# Altium PCB Lampda_PCB_V1_1.pcbdoc (part 2 of 2)
Units mm, origin at the board's own origin, x right, y up, seen from the top; angles counter-clockwise.
Board outline 70.99 x 71.73 mm, 2 copper layers (Top Layer, Bottom Layer); 134 components, 139 nets, 552 pads, 286 vias.
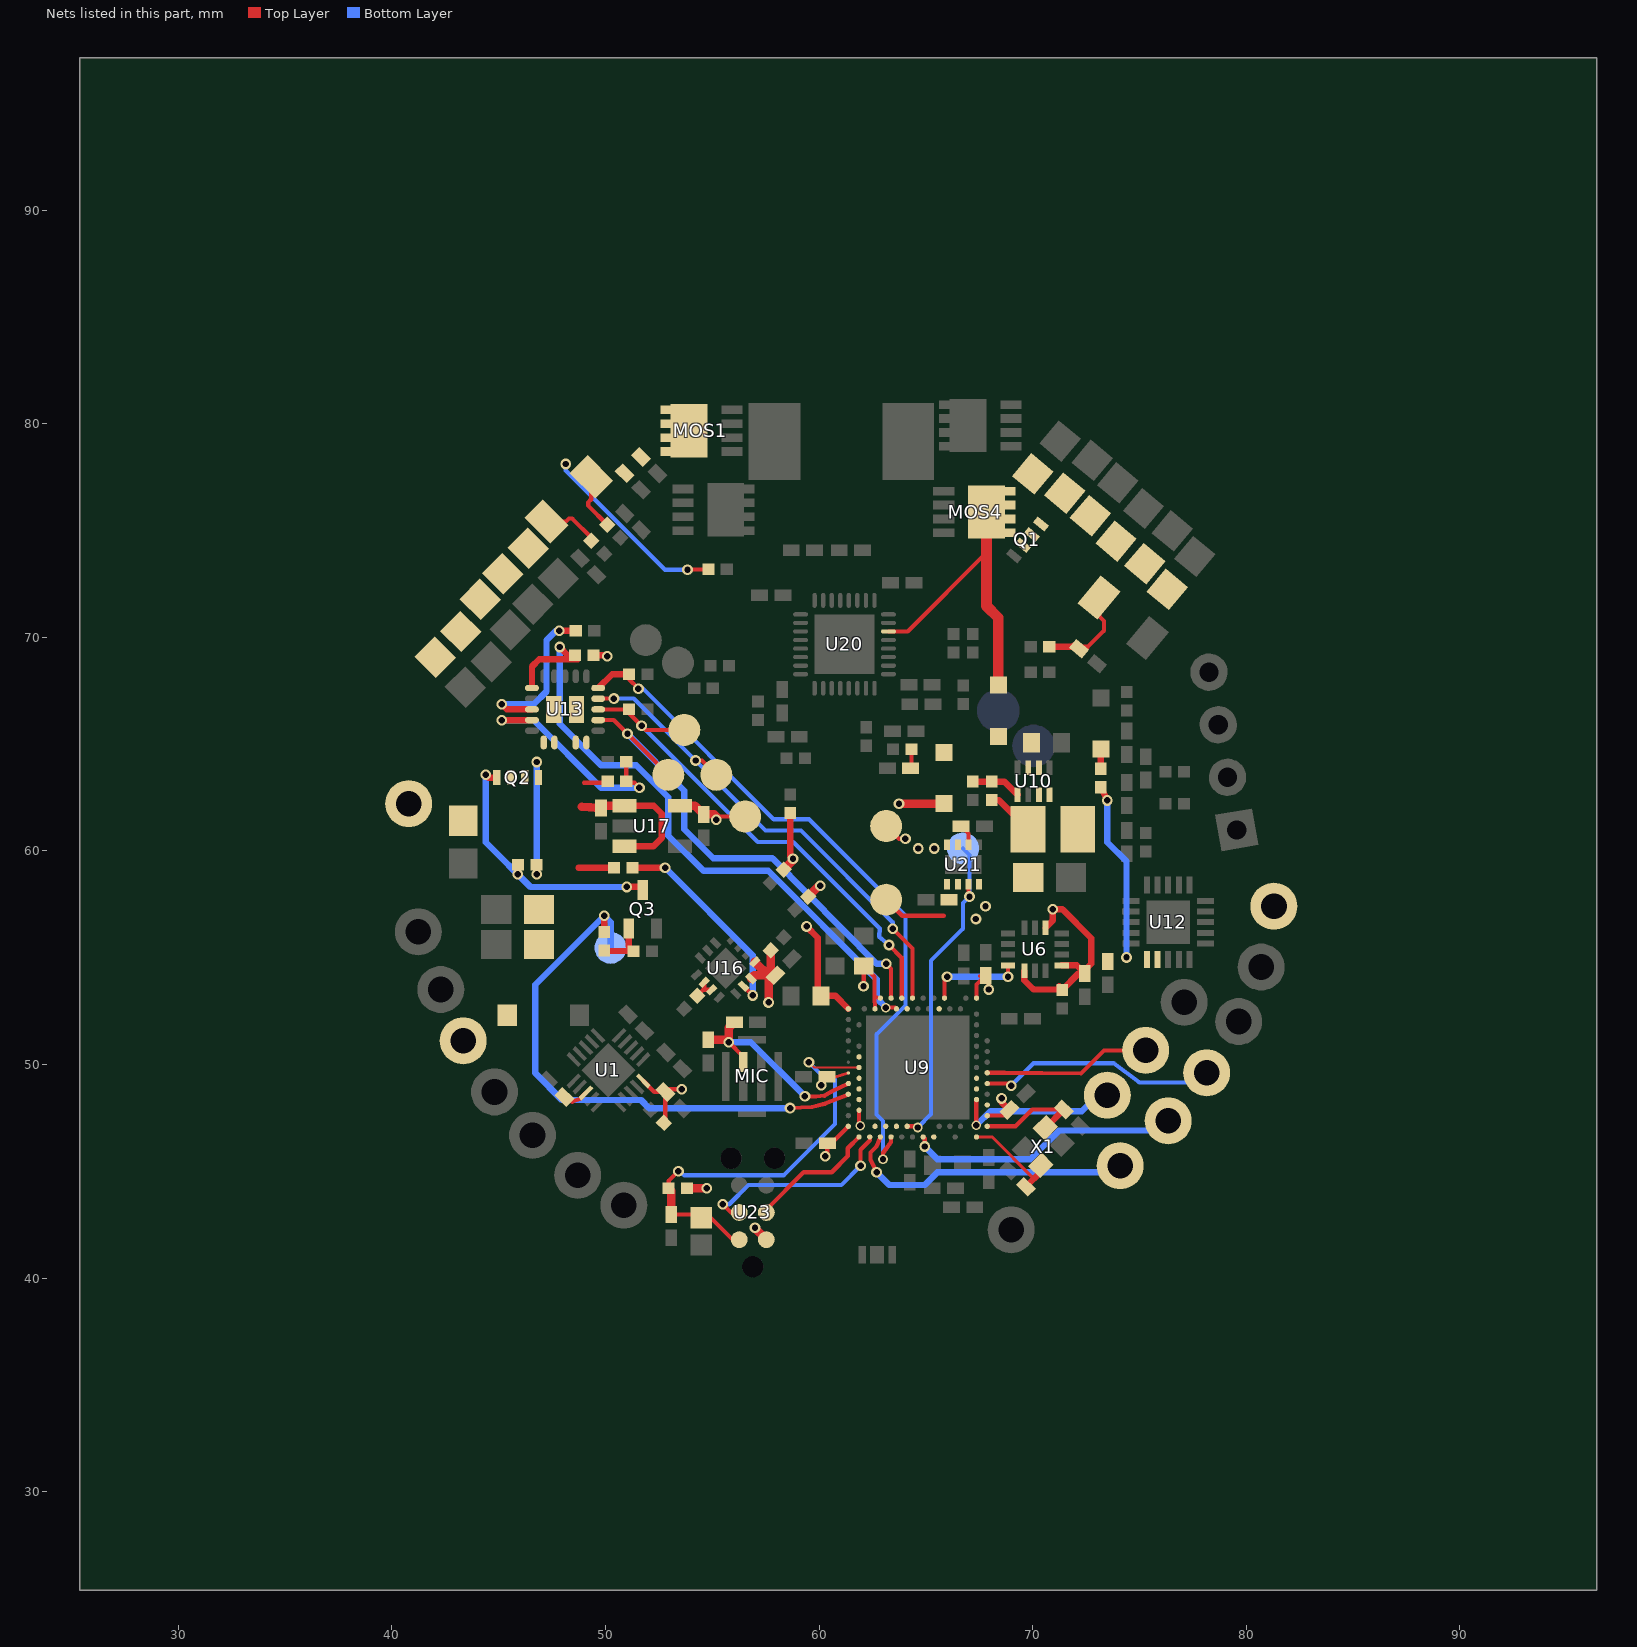
[diagram p2: the nets of this part, all layers, seen from the top]

## Via types
v1: diameter 0.5, hole 0.3, Top Layer to Bottom Layer, tented both sides, 276 vias
v2: diameter 0.45, hole 0.3, Top Layer to Bottom Layer, tented both sides, 10 vias

## Nets (pads, with @x,y where several pads share a name; then routed paths per layer and width w, separated by ;. In a path a pad name is that pad's centre, name@x,y a point inside that pad or via, vN(x,y) a via of type N, cw(c..) or ccw(c..) an arc to the next point about the centre after c; other vN are vias at no path point) (continued)
P0.08: pad.11 U9.N1 U13.4 | length 23.3
  Top Layer w0.2: U13.4@49.664,67.128 v1@50.4,67.135 ; v1(54.222,64.237) 54.524,64.237 pad.11@55.194,63.567 ; v1@63.445,56.368 64.373,55.438 U9.N1@64.374,53.113
  Bottom Layer w0.2: v1@50.4,67.135 51.327,67.135 54.223,64.237 56.265,62.193 57.499,60.957 59.153,60.957 63.445,56.665 v1@63.445,56.368
  other v1: 63.444,56.366 50.4,67.136
P0.09: pad.@76.343,47.367 U9.L24 | length 13.1
  Top Layer w0.2: U9.L24@64.874,46.613 64.945,46.542 v1(64.945,46.167)
  Bottom Layer w0.3: v1(64.945,46.167) 65.544,45.568 69.895,45.568 71.246,46.916 76.344,46.916 pad.@76.344,47.366
P0.10: U9.J24
P0.11: U9.T2 U13.11 U15.1 | length 30.6
  Top Layer w0.2: v2(63.128,52.67) 63.567,52.67 U9.T2@63.624,52.613
  Top Layer w0.3: U13.11@46.565,67.627 46.565,68.633 46.9,68.971 U15.1@48.703,68.969 ; v1@47.86,69.548 48.241,69.167 U15.1@48.57,69.168
  Bottom Layer w0.3: v1@47.86,69.548 47.86,65.951 49.796,64.016 51.444,64.016 52.945,62.517 52.945,60.716 54.594,59.068 57.619,59.068 62.694,53.993 62.694,53.119 v2@63.143,52.667
  other v1: 47.86,69.549
P0.16: U9.AC11
P0.19: U9.AC15
P0.20: C46.1 C58.2 MIC.1 U9.AD16 | length 10
  Top Layer w0.2: v1(55.777,51.051) 56.443,50.385 MIC.1@56.443,50.125 ; v1@59.341,48.514 59.874,48.509 60.255,48.549 60.591,48.74 U9.AD16@61.374,49.113
  Top Layer w0.4: C46.1@54.824,51.167 55.662,51.167 v1(55.777,51.051) 55.777,51.724 C58.2@56.038,51.985
  Bottom Layer w0.3: v1(55.777,51.051) 56.803,51.051 v1@59.341,48.514
  other v1: 59.34,48.514
P0.21: U9.AC17
P0.23: U9.AC19
P0.25: U9.AC21 | length 0.8
  Top Layer w0.2: U9.AC21@61.873,47.863 61.873,47.197 v2(61.937,47.132)
P0.26: U6.4 U9.G1 | length 4.5
  Top Layer w0.2: U9.G1@65.874,53.114 65.874,54.116 v1(65.995,54.116) ; v1(68.844,54.116) 68.844,54.645 U6.4@68.847,54.647
  Bottom Layer w0.3: v1(65.995,54.116) v1(68.844,54.116)
P0.27: U9.H2
P1.01: U9.Y23
P1.02: pad.@74.093,45.267 U9.W24 | length 14.1
  Top Layer w0.2: v1(62.695,44.967) v1(62.695,44.967) 62.414,45.547 62.414,45.885 62.694,46.167 ; 62.695,46.167 U9.W24@62.874,46.613
  Bottom Layer w0.3: v1(62.695,44.967) 63.295,44.366 64.944,44.366 65.544,44.966 74.094,44.966 pad.@74.094,45.267
P1.03: U9.V23
P1.05: U9.T23
P1.07: pad.10@66.744,60.117 U9.P23 U21.3 | length 15.3
  Top Layer w0.2: U9.P23@64.124,47.113 64.563,47.113 v2(64.619,47.057) ; U21.3@66.995,58.439 66.994,57.916 v1(67.044,57.867)
  Bottom Layer w0.2: v2@64.619,47.056 65.244,47.681 65.244,54.867 66.745,56.365 66.745,57.567 67.045,57.866 67.044,59.817 pad.10@66.744,60.117
P1.08: U9.P2
P1.09: pad.3 U8.2 U9.R1 U13.3 | length 23.3
  Top Layer w0.2: U13.3@49.664,66.628 U8.2@51.11,66.628 51.11,66.444 v1(51.693,65.861) 51.887,65.666 pad.3@53.694,65.667 ; v1@63.275,55.601 63.875,54.999 U9.R1@63.875,53.114
  Bottom Layer w0.2: v1(51.693,65.861) 57.136,60.416 58.795,60.416 62.843,56.368 62.816,55.987 v1@63.275,55.601
  other v1: 63.275,55.599
P1.10: U9.A20
P1.11: pad.@73.493,48.568 U9.B19 | length 7.9
  Top Layer w0.2: v2(67.365,47.155) 67.365,48.355 U9.B19@67.374,48.363
  Bottom Layer w0.3: v2(67.365,47.155) 68.025,47.816 72.292,47.816 73.044,48.567 pad.@73.494,48.567
P1.12: U9.B17
P1.13: pad.@78.144,49.617 U9.A16 | length 11.2
  Top Layer w0.2: U9.A16@67.873,49.113 68.898,49.113 v1(68.995,49.016)
  Bottom Layer w0.2: v1(68.995,49.016) 70.045,50.067 73.794,50.067 74.995,49.167 77.694,49.167 pad.@78.144,49.617
P1.14: U9.B15
P1.15: pad.@75.293,50.668 U9.A14 | length 7.9
  Top Layer w0.2: U9.A14@67.873,49.613 68.695,49.617 ; 68.696,49.616 72.264,49.588 73.344,50.665 pad.@75.295,50.665
POWER_RAIL: C5.2 C18.2 C19.2 C32.2 C34.2 Q2.1 Q2.2 Q2.3 R11.2 RAC1.1 U7.1 U13.16 U13.17 U13.22 | length 7.8
  Top Layer w0.2: RAC1.1@47.249,75.421 48.15,75.42 48.294,75.568 48.444,75.568 R11.2@49.338,74.673
  Bottom Layer w0.3: v1(46.791,64.166) 46.794,64.164 v1@46.794,58.916
  other v1: 46.794,58.917
Q2_4: Q2.4 Q3.3 U7.2 | length 12
  Top Layer w0.3: v1(44.394,63.567) 44.53,63.431 Q2.4@44.92,63.431 ; v1(50.995,58.317) 51.592,58.317 Q3.3@51.745,58.165
  Bottom Layer w0.3: v1@44.395,63.566 44.395,60.416 46.496,58.316 v1(50.995,58.317)
  other v1: 45.894,58.917
R1_1: Q3.1 R1.1 R19.2 | length 2.5
  Top Layer w0.3: R19.2@49.945,55.334 51.312,55.316 51.095,55.534 Q3.1@51.095,56.369
R9_2: C7.2 R9.2 RSR1.1 | length 4.9
  Top Layer w0.2: C7.2@72.178,69.466 72.277,69.566 72.595,69.566 73.344,70.315 73.344,70.767 73.113,70.998 RSR1.1@73.113,71.867
  Top Layer w0.3: R9.2@70.777,69.567 72.077,69.567 C7.2@72.177,69.467 72.033,69.61 C7.2@71.914,69.61
R10_1: C23.1 C44.1 MOS1.5 MOS1.6 MOS1.7 MOS1.8 R10.1 R12.1 RAC1.2 | length 11.6
  Top Layer w0.2: RAC1.2@49.341,77.513 49.341,76.462 49.194,76.317 49.194,76.167 R12.1@50.088,75.273 ; v1@53.844,73.167 R10.1@54.818,73.177
  Bottom Layer w0.2: v1@48.145,78.118 48.145,77.815 52.795,73.167 v1@53.844,73.167
  other v1: 53.844,73.167 48.144,78.116
R15_2: R15.2 U16.2 | length 9.8
  Top Layer w0.2: U16.2@56.464,53.676 v1(56.901,53.238)
  Top Layer w0.3: R15.2@51.277,59.217 v1(52.794,59.217)
  Bottom Layer w0.3: v1(52.794,59.217) 52.796,59.217 56.902,55.11 v1@56.902,53.238
R20_2: C20.1 R20.2 | length 0.9
  Top Layer w0.2: C20.1@64.29,63.866 64.327,63.904 R20.2@64.327,64.767
R31_2: R31.2 U28.1 | length 0.9
  Top Layer w0.3: R31.2@73.194,63.849 U28.1@73.194,64.767
RESET: C28.2 pad.1@54.488,42.824 U4.1 U9.AC13 U23.2 | length 20.4
  Top Layer w0.102: v1@59.529,50.107 59.773,49.863 U9.AC13@61.873,49.863
  Top Layer w0.2: U4.1@52.962,44.217 52.962,44.558 v1(53.42,45.016) ; C28.2@53.091,42.988 54.324,42.989 pad.1@54.488,42.824 ; pad.1@54.489,42.824 54.936,42.824 55.952,41.808 U23.2@56.267,41.808
  Top Layer w0.4: U4.1@52.962,44.217 53.091,44.087 C28.2@53.091,42.988
  Bottom Layer w0.2: v1@53.41,45.016 53.694,44.816 58.345,44.816 60.745,47.216 60.745,49.317 60.453,49.609 60.027,49.609 v1@59.529,50.107
  other v1: 59.529,50.107
S$72260: 
S$72264: 
S$72268: 
S$72290: 
S$72297: 
S$72301: 
S$72368: 
S$72378: 
S$72382: 
S$72386: 
S$334299: 
S$334303: 
S$488258: 
S$488268: 
S$488287: 
S$488291: 
S$573256: 
S$573287: 
STRIP+: C30.2 pad.@40.794,62.217
STRIP_OUT_DRV: pad.12 R19.1 U9.AD18 | length 26.5
  Top Layer w0.2: v1@58.645,47.965 59.671,48.014 60.276,48.171 U9.AD18@61.374,48.613
  Top Layer w0.3: R19.1@49.945,56.2 v1@49.945,56.967
  Bottom Layer w0.3: pad.12@50.244,55.467 50.245,56.667 v1(49.945,56.967) 46.717,53.739 46.717,52.382 46.717,49.609 47.972,48.344 51.67,48.344 52.046,47.963 v1@58.645,47.963
  other v1: 58.645,47.967
SWDCLK: U9.AA24 U23.4 | length 9.6
  Top Layer w0.2: v1(55.495,43.467) 55.883,43.078 U23.4@56.266,43.078 ; v1(61.945,45.267) 61.945,46.017 62.39,46.462 U9.AA24@62.39,46.6
  Bottom Layer w0.2: v1@55.495,43.467 55.795,43.467 56.694,44.366 61.045,44.366 v1(61.945,45.267)
SWDIO: U9.AC24 U23.3 | length 6.1
  Top Layer w0.2: U23.3@57.537,43.078 57.537,43.223 59.28,44.966 60.596,44.966 61.345,45.717 61.345,46.086 U9.AC24@61.873,46.613
U1_3: C11.1 U1.3 | length 1.2
  Top Layer w0.2: C11.1@48.081,48.481 48.444,48.268 48.802,48.395 U1.3@49.085,48.676
U10_1: R8.1 R13.2 U10.1 | length 2.4
  Top Layer w0.3: R8.1@67.195,63.249 R13.2@68.095,63.249 68.672,63.249 U10.1@69.295,62.627
U10_4: L3.1 U10.4
U10_6: C60.2 U10.6 U10.7 U26.1 U27.1
U12_16: C22.2 R31.1 U12.16 U12.17 | length 8.4
  Top Layer w0.3: R31.1@73.194,62.984 v1(73.494,62.366)
  Bottom Layer w0.3: v1(73.494,62.366) 73.494,60.416 74.394,59.517 v1(74.394,55.016)
U13_13: R5.2 U13.13 | length 7.8
  Top Layer w0.3: v1(45.145,66.867) 45.384,66.628 U13.13@46.564,66.628 ; v1(47.845,70.316) R5.2@48.612,70.316
  Bottom Layer w0.3: v1@45.145,66.865 46.643,66.865 47.245,67.467 47.245,69.868 47.695,70.317 v1@47.845,70.317
U13_14: R6.1 R7.1 U13.14 | length 10.8
  Top Layer w0.2: R6.1@50.977,64.166 50.977,63.307 51.086,63.199 51.363,63.199 v1(51.595,62.967)
  Top Layer w0.3: v1(45.145,66.116) 45.154,66.126 U13.14@46.565,66.126
  Bottom Layer w0.3: v1@45.145,66.116 46.643,66.116 49.796,62.967 v1(51.595,62.967)
U16_12: U16.12 U16.13 U25.1 | length 1.7
  Top Layer w0.2: U16.12@54.622,53.853 54.622,53.544 U25.1@54.301,53.223 ; U16.13@54.976,53.499 54.577,53.499 U25.1@54.301,53.223 ; U25.1@54.286,53.208 54.286,53.163 U25.1@54.286,53.208 ; U25.1@54.286,53.208 U25.1@54.301,53.223 ; U25.1@54.286,53.208 U25.1@54.301,53.223
U21_6: C29.1 U21.6 | length 1
  Top Layer w0.2: C29.1@66.649,61.167 66.994,60.822 U21.6@66.995,60.294
V33: C37.1 C40.1 C41.1 C48.2 C51.1 C55.1 C57.2 L3.2 pad.9@63.144,57.717 R13.1 U4.2 U9.A22 U9.AD14 U9.AD23 U9.B1 U9.W1 U9.Y2 U10.3 U21.1 U21.2 U21.4 U23.1 | length 63.3
  Top Layer w0.152: C41.1@60.367,49.428 60.766,49.421 U9.AD14@61.374,49.613
  Top Layer w0.2: v1(60.295,45.716) 60.39,45.812 C40.1@60.39,46.317 60.577,46.316 U9.AD23@61.374,47.113 ; v1(62.084,53.674) 62.094,53.684 C37.1@62.095,54.617 62.595,54.116 62.595,53.167 U9.W1@62.874,53.114 ; 62.595,53.167 U9.Y2@62.624,52.613 ; pad.9@63.144,57.717 63.894,56.967 65.844,56.967 ; U9.B1@67.374,53.113 67.374,53.75 C55.1@67.795,54.171 ; C55.1@67.544,54.144 67.768,54.144 C55.1@67.795,54.171 ; U9.A22@67.873,47.613 68.641,47.613 C51.1@68.909,47.881 ; v1(67.945,53.517) 67.945,54.021 C55.1@67.795,54.171
  Top Layer w0.3: R13.1@68.095,62.384 68.409,62.385 L3.2@69.778,61.016 ; v1(68.545,48.416) 68.545,48.246 C51.1@68.909,47.881
  Top Layer w0.4: U4.2@53.827,44.217 v1(54.744,44.217) ; v1(57.004,42.371) 57.004,42.341 U23.1@57.536,41.808
  Mid-Layer 2 w0.4: v1(54.744,44.217) 54.744,46.917 57.144,49.317 59.694,49.316 v1(60.103,49.04) ; v1@57.004,42.37 57.004,43.175 59.094,45.265 59.843,45.265 v1(60.295,45.716) ; 59.729,49.456 60.103,49.081 v1(60.103,49.04) ; v1(60.295,45.716) 60.293,47.366 62.544,49.616 62.544,52.466 ; v1@62.084,53.673 63.451,53.673 65.498,55.72 66.247,55.72 v1(67.344,56.816) ; 62.545,53.666 62.544,51.265 60.596,49.317 v1(60.103,49.04) ; 67.342,54.414 67.342,54.864 68.094,55.616 68.094,57.117 v1(67.794,57.416) ; v1(67.945,53.517) 67.945,53.816 67.344,54.417 67.344,53.157 67.494,52.738 67.494,49.466 v1(68.545,48.416)
V33_EXT: C2.2 C3.2 C47.2 pad.9@63.144,61.167 pad.@81.295,57.417 R17.2 R32.2 R33.2 U1.10 U3.1 U5.2 U6.5 U6.8 U6.12 U15.2 U16.3 U16.4 U21.7 U21.8 U24.2 | length 89.1
  Top Layer w0.2: U1.10@51.772,49.241 52.288,48.725 C2.2@52.808,48.725 52.931,48.848 v1(53.575,48.848) ; R17.2@52.739,47.27 52.807,47.27 C2.2@52.807,48.726 ; pad.9@63.144,61.167 63.744,60.567 v1(64.045,60.567)
  Top Layer w0.3: U15.2@49.435,69.168 50.043,69.168 v1(50.094,69.116) ; U5.2@58.645,61.784 58.645,59.779 v1(58.782,59.643) ; U6.5@69.61,54.384 69.61,53.952 69.895,53.668 70.045,53.517 71.396,53.5 72.145,54.267 72.447,54.267 72.447,54.419 72.744,54.716 72.744,55.917 71.394,57.267 v1(70.945,57.267) 70.945,56.745 U6.12@70.609,56.41 ; U24.2@71.246,53.668 71.394,53.519 U24.2@71.394,53.499 ; U6.8@71.371,54.647 72.067,54.647 C47.2@72.446,54.268
  Top Layer w0.4: U16.3@56.818,54.029 56.97,54.181 C3.2@57.959,54.181 ; U16.4@56.994,54.811 57.624,54.181 C3.2@57.959,54.181 ; v1@57.639,52.911 C3.2@57.639,54.181 ; U3.1@57.738,55.345 57.738,54.181 C3.2@57.959,54.181 ; R33.2@58.35,59.132 58.782,59.564 v1(58.782,59.643) ; R32.2@59.493,57.862 60.004,58.373 v1(60.052,58.373)
  Mid-Layer 2 w0.3: v1(70.945,57.267) 70.944,58.316 72.445,59.817 74.096,59.817 76.344,57.567 81.294,57.567 pad.@81.295,57.417
  Mid-Layer 2 w0.4: v1(50.094,69.116) 53.844,69.116 55.493,67.467 60.593,67.467 64.644,63.116 64.645,61.767 65.394,61.167 65.394,60.117 66.753,58.758 69.717,58.758 70.945,57.53 v1(70.945,57.267) ; v1@53.575,48.847 54.462,48.847 57.639,52.022 57.639,52.949 58.957,54.267 60.146,54.267 64.645,58.766 v1(64.645,60.116) ; v1(58.782,59.643) v1(60.052,58.373) ; 59.481,58.936 60.062,59.517 62.995,59.517 v1(64.045,60.567)
  other v1: 57.639,52.912 65.393,60.116
VBUS: C24.1 C27.1 C39.2 pad.@43.345,51.117 R7.2 R15.1 U11.1 U13.19 U13.20 U13.21 U17.1 U17.3 | length 9.9
  Top Layer w0.2: 49.003,63.198 R7.2@50.22,63.198
  Top Layer w0.3: 48.744,59.218 R15.1@50.413,59.218 ; U17.3@50.895,60.217 52.254,60.217 52.645,60.609 52.645,61.736 52.267,62.117 U17.1@50.895,62.117
  Top Layer w0.4: 48.895,62.067 C39.2@49.796,62.012 ; C39.2@49.795,62.012 49.899,62.116 U17.1@50.895,62.116
VBUS5: C21.2 C45.1 pad.4 U9.AD2 U17.5 U26.2 | length 26.4
  Top Layer w0.2: v1(55.195,61.466) 55.345,61.617 pad.4@56.545,61.617
  Top Layer w0.3: v1@59.417,56.467 59.938,55.946 59.938,53.216 C45.1@60.095,53.216 ; C45.1@60.094,53.217 60.77,53.217 U9.AD2@61.374,52.613
  Top Layer w0.4: U17.5@53.495,62.116 54.19,62.116 C21.2@54.595,61.712 55.099,61.712 55.195,61.617 v1(55.195,61.466) ; v1(63.744,62.217) U26.2@65.845,62.216
  Mid-Layer 2 w0.3: v1(55.195,61.466) 55.344,61.466 59.417,57.394 v1@59.417,56.467
  Mid-Layer 2 w0.4: v1(55.195,61.466) 62.994,61.466 63.12,61.592 v1(63.744,62.217)
  other v1: 59.417,56.468
VBUS_GATE_DRV: pad.2 U9.U1 U13.2 | length 23.7
  Top Layer w0.2: U13.2@49.664,66.128 50.391,66.128 v1(51.035,65.485) 52.945,63.574 pad.2@52.944,63.567 ; v1(63.144,54.716) 63.374,54.487 U9.U1@63.374,53.114
  Bottom Layer w0.3: v1@51.035,65.484 53.694,62.824 53.694,61.016 55.043,59.667 57.819,59.667 62.695,54.717 v1(63.144,54.716)
VSBUS_DSCH: U2.2 U9.U24 U13.5 | length 32.7
  Top Layer w0.2: U2.2@51.11,68.279 51.11,68.039 v1(51.547,67.601) ; v2@62.996,45.568 62.995,45.867 63.374,46.396 U9.U24@63.374,46.614
  Top Layer w0.3: U13.5@49.664,67.627 50.314,68.279 U2.2@51.11,68.279
  Bottom Layer w0.2: v1@51.548,67.602 51.759,67.602 57.875,61.486 59.526,61.486 64.045,56.967 64.045,52.766 62.694,51.417 62.694,47.666 62.996,47.366 v2@62.996,45.568
  other v2: 62.995,45.567
VSYS: C35.1 C36.1 C43.1 C52.1 C56.1 C59.1 MOS4.5 MOS4.6 MOS4.7 MOS4.8 Q1.1 Q1.2 Q1.3 U20.22 U27.2 | length 16.3
  Top Layer w0.2: U20.22@63.252,70.277 64.154,70.277 67.842,73.965 MOS4.8@67.842,75.866
  Top Layer w0.5: MOS4.8@67.842,75.866 67.842,71.468 68.393,70.917 U27.2@68.395,67.767
XC1: C31.2 U9.B24 X1.1 | length 4.8
  Top Layer w0.152: U9.B24@67.374,46.613 68.096,46.614 70.044,44.666
  Top Layer w0.3: C31.2@69.68,44.281 70.388,44.989 X1.1@70.389,45.283
XC2: C16.2 U9.A23 X1.3 | length 5.1
  Top Layer w0.2: U9.A23@67.873,47.114 69.193,47.114 69.983,47.904 C16.2@71.459,47.902
  Top Layer w0.3: X1.3@70.601,47.05 70.608,47.05 C16.2@71.459,47.902
pads on no net: F1.2 U1.1 U1.2 U1.14 U1.15 U6.10 U6.11 U9.A18 U9.AB2 U9.B3 U10.2 U12.9 U12.10 U12.15 U13.6 U13.7 U13.8 U13.9 U13.10 U17.4 U23. U23.5

## Polygon pours and split planes (outlines as drawn)
GND on Mid-Layer 1 (solid): 45.289,78.062 52.339,82.412 60.071,84.426 67.789,83.162 75.311,80.616 80.694,73.766 83.694,66.266 83.694,59.816 83.394,57.867 80.094,57.567 65.095,57.567 63.895,58.467 63.295,58.317 63.445,57.717 64.795,56.667 71.845,56.667 76.045,52.617 72.894,48.417 73.945,45.267 71.545,43.467 72.445,41.517 67.639,39.513 67.639,44.463 57.76,44.476 57.76,38.507 50.839,40.713 45.139,44.163 40.339,50.313 38.1,56.994 38.735,65.503 40.789,72.213
VBUS on Top Layer (solid): 46.795,51.267 42.595,48.867 41.245,51.417 46.045,54.117 46.045,58.016 47.395,58.616 47.395,63.566 48.295,64.616 48.295,67.317 49.105,67.317 49.13,65.866 49.495,65.366 49.495,62.817 49.045,62.217 49.045,54.417
POWER_RAIL on Top Layer (solid): 41.845,73.016 45.295,77.966 48.295,75.266 47.545,74.216 45.295,71.966 45.145,71.516 44.245,70.616 44.245,70.166 43.045,68.966 42.145,67.917 42.145,67.317 43.195,66.266 44.695,66.266 45.445,65.516 46.795,65.516 47.095,65.816 47.095,67.317 47.995,67.317 47.995,64.616 47.095,63.417 47.095,62.966 44.845,62.966 44.845,63.866 43.795,64.016 43.345,64.166 38.995,64.166 39.745,67.016 40.045,68.216
R10_1 on Top Layer (solid): 52.329,81.813 54.445,82.466 54.895,82.016 54.895,78.416 54.745,78.266 52.645,78.266 52.045,78.116 50.995,77.216 50.395,77.216 49.495,76.316 46.995,78.892
CH_SW1 on Top Layer (solid): 55.195,80.366 56.545,80.366 56.545,81.116 56.845,81.416 59.545,81.416 59.478,74.139 59.995,73.616 59.995,71.216 59.395,71.216 56.245,74.666 54.745,74.666 54.745,77.516 55.195,77.966
CH_SW2 on Top Layer (solid): 62.695,81.416 67.645,81.416 67.945,81.116 67.945,78.566 67.195,78.566 66.595,77.966 66.553,74.701 65.029,73.177 64.945,71.666 64.195,70.766 63.595,70.616 62.845,70.616 62.845,71.066 62.695,71.216 62.695,77.516
VSYS on Top Layer (solid): 66.871,77.241 68.395,77.216 69.895,79.016 76.345,73.766 76.345,73.316 77.394,72.416 76.194,71.066 74.994,71.966 74.994,72.266 71.545,75.116 70.945,75.116 69.745,73.766 68.845,74.516 66.895,74.516
GND on Top Layer (solid): 47.845,73.916 49.345,72.416 50.095,73.016 52.945,70.316 50.995,70.316 50.545,70.916 48.145,70.916 47.695,70.766 47.695,68.816 46.645,68.816 46.645,67.917 46.645,66.266 43.645,66.266 42.445,67.616 44.545,69.716 44.545,70.466
GND on Top Layer (solid): 40.795,51.867 45.595,54.417 45.595,58.616 43.945,60.267 38.395,60.267 38.395,57.267
U10_6 on Top Layer (solid): 70.494,65.816 70.494,63.417 69.445,63.417 69.445,64.616 66.895,64.616 66.295,64.166 65.395,64.166 65.395,65.216 66.145,65.816
V33 on Top Layer (solid): 68.845,62.067 68.845,59.516 68.245,58.767 65.695,58.767 65.695,56.367 69.745,56.367 69.745,57.717 70.494,57.717 70.502,59.435 70.598,59.934 70.595,62.091 70.433,62.287 70.436,62.966 70.153,62.966 70.155,62.217 70.014,62.069
U10_4 on Top Layer (solid): 70.645,62.966 72.042,62.966 72.894,62.217 72.894,59.816 71.245,59.816 71.245,61.916 70.945,62.217 70.645,62.217
GND on Top Layer (solid): 48.145,52.767 49.345,54.417 50.845,54.417 51.445,53.817 50.095,52.467 50.095,51.117 51.416,49.737 50.146,48.467 48.876,49.737 48.895,50.517 48.145,51.267
GND on Top Layer (solid): 70.794,66.566 72.145,66.566 72.445,66.266 72.445,63.716 72.145,63.417 71.245,63.417 70.645,63.417 70.645,64.316 70.794,64.316
GND on Top Layer (solid): 68.434,56.468 70.466,56.468 70.847,55.96 70.847,54.055 69.577,54.055 69.577,54.563 69.323,54.817 68.561,54.817 68.434,54.944
GND on Top Layer (solid): 51.895,55.017 51.895,55.617 52.045,55.767 52.045,56.967 54.595,56.967 56.845,54.567 55.607,53.293 54.591,54.436 54.295,55.017
GND on Top Layer (solid): 65.845,59.816 67.344,59.816 67.345,61.467 68.545,61.467 68.545,59.516 68.095,58.916 65.845,58.916
GND on Top Layer (solid): 50.845,76.616 52.345,78.116 54.745,78.116 54.745,74.966 57.595,74.816 57.595,73.016 56.095,73.016 56.095,69.716 52.945,69.866 49.645,73.016 51.745,74.816 51.745,75.716
V33_EXT on Top Layer (solid): 65.095,61.017 65.395,60.716 66.745,60.716 66.745,59.967 65.845,59.967 65.545,59.667 63.895,59.667 63.595,59.967 63.595,60.716 63.895,61.017
GND on Top Layer (solid): 55.495,50.067 56.845,50.067 56.845,48.267 57.895,48.267 57.895,46.767 55.495,46.767
GND on Top Layer (solid): 71.094,59.516 73.945,59.516 73.945,58.016 71.094,58.016
GND on Top Layer (solid): 74.094,60.416 76.944,60.416 78.144,59.216 78.144,57.867 77.844,55.467 75.145,55.467 75.145,57.416 74.094,57.416 74.094,58.016
U12_16 on Top Layer (solid): 76.045,55.317 76.045,54.417 73.194,54.417 73.194,55.317
STRIP+ on Top Layer (solid): 38.845,63.866 44.395,63.866 44.695,62.817 47.245,62.817 47.245,59.816 44.695,59.816 43.945,60.567 38.695,60.567
BAT+ on Top Layer (solid): 73.945,69.266 75.445,71.066 76.944,69.716 76.944,68.366 77.094,67.466 77.694,67.016 79.644,67.016 80.094,66.566 80.094,65.366 79.344,64.616 75.894,64.616 73.945,66.717 72.745,66.717 72.745,67.616 73.945,68.966
GND on Top Layer (solid): 70.345,78.866 69.445,78.716 68.395,77.516 67.345,77.516 67.345,78.416 68.095,78.416 68.395,78.716 68.395,80.666 69.895,82.166 75.445,79.016 80.394,73.466 82.794,68.066 79.944,67.317 78.594,67.166 77.694,67.166 77.244,67.466 77.094,68.366 77.094,70.016 76.345,70.916 77.694,72.416 77.694,72.716 76.644,73.616 76.494,74.066
R9_2 on Top Layer (solid): 69.595,73.016 71.245,74.966 74.394,72.266 72.745,70.466
GND on Top Layer (solid): 56.845,83.066 59.545,83.816 62.395,83.816 65.095,83.216 65.095,80.966 64.945,75.116 61.945,75.116 61.495,74.516 57.145,74.516

## Keep-outs
Keep-Out Layer:
  lines w0.254 net S$573256: 39.141,60.46 cw(c39.295,58.767) 39.599,57.094 ; 39.203,60.568 cw(c61.195,61.167) 74.081,43.336
  lines w0.254 net S$573287: 39.586,57.115 ccw(c61.209,61.166) 71.096,41.513 ; 71.103,41.601 cw(c72.594,42.417) 74.037,43.317

## Other copper
Top Layer:
  drawing of 560 lines, arcs and shapes, not listed
Mid-Layer 2:
  region net V33_EXT: 80.653,58.31 80.488,56.669 79.789,57.417 79.82,57.717
  region net CH_VDDA: 57.544,68.202 57.278,68.466 57.428,68.564 57.641,68.352
  region net CH_VDDA: 67.382,70.932 67.007,70.932 67.044,71.067 67.344,71.067
  region net VBUS5: 55.36,61.279 55.36,61.654 55.535,61.666 55.535,61.266
  region net VBUS5: 55.427,61.559 55.257,61.224 55.427,61.172 55.57,61.453
  region net VBUS5: 59.604,56.633 59.229,56.633 59.267,56.808 59.567,56.808
  region net VBUS5: 63.76,61.967 63.495,62.232 63.362,62.117 63.645,61.834
  region net V33: 60.071,49.288 59.861,48.977 59.709,49.065 59.933,49.397
  region net V33: 60.339,48.958 60.156,49.285 60.302,49.381 60.498,49.032
  region net V33: 60.14,49.288 59.853,49.046 59.73,49.171 60.037,49.43
  region net V33: 60.481,45.883 60.106,45.881 60.093,46.056 60.493,46.058
  region net V33: 60.31,45.467 60.045,45.732 59.912,45.617 60.195,45.334
  region net V33: 62.249,53.861 62.248,53.486 62.423,53.473 62.424,53.873
  region net V33: 68.132,53.682 67.757,53.682 67.745,53.816 68.145,53.816
  region net V33: 68.56,48.666 68.295,48.401 68.162,48.516 68.445,48.799
  region net V33: 68.044,57.432 67.779,57.167 67.893,57.034 68.177,57.317
  region net V33: 54.932,44.382 54.557,44.382 54.544,44.557 54.944,44.557
  region net V33: 57.191,42.536 56.816,42.536 56.804,42.711 57.204,42.711
  region net V33_EXT: 60.067,58.622 59.802,58.357 59.669,58.472 59.952,58.755
  region net V33_EXT: 59.031,59.658 58.766,59.393 58.881,59.26 59.164,59.543
  region net V33_EXT: 50.26,68.929 50.26,69.304 50.435,69.316 50.435,68.916
  region net V33_EXT: 57.826,52.746 57.451,52.746 57.439,52.571 57.839,52.571
  region net V33_EXT: 57.888,52.915 57.604,53.159 57.708,53.3 58.012,53.039
  region net V33_EXT: 53.74,49.035 53.739,48.66 53.914,48.647 53.915,49.047
  region net V33_EXT: 71.132,57.432 70.757,57.432 70.745,57.53 71.145,57.53
  region net V33_EXT: 71.132,57.433 70.757,57.431 70.794,57.607 71.094,57.607
  region net V33_EXT: 64.832,59.951 64.457,59.951 64.445,59.776 64.845,59.776
  region net V33_EXT: 65.643,60.132 65.378,59.867 65.493,59.734 65.776,60.018
  region net V33_EXT: 65.581,60.282 65.206,60.282 65.194,60.457 65.594,60.457
  region net V33_EXT: 64.06,60.317 63.795,60.582 63.663,60.467 63.945,60.184
  region net V33: 67.36,56.567 67.095,56.833 66.962,56.718 67.245,56.435
Bottom Layer:
  region net POWER_RAIL: 46.98,64.003 46.605,64 46.644,63.825 46.944,63.827
  region net POWER_RAIL: 46.981,59.082 46.606,59.082 46.644,59.257 46.944,59.257
  region net Q2_4: 45.91,59.166 45.644,58.902 45.547,59.052 45.76,59.264
  region net Q2_4: 46.143,58.933 45.879,58.667 46.029,58.57 46.241,58.783
  region net CH_ACP: 50.643,73.482 50.378,73.217 50.528,73.12 50.74,73.332
  region net CH_ACN: 51.243,74.082 50.978,73.817 51.128,73.72 51.341,73.932
  region net CH_ACP: 55.928,70.279 55.928,70.654 55.753,70.617 55.753,70.317
  region net CH_ACN: 57.579,70.879 57.579,71.254 57.404,71.217 57.404,70.917
  region net R10_1: 53.679,73.354 53.678,72.979 53.503,73.067 53.504,73.267
  region net R10_1: 48.332,77.951 47.957,77.951 48.044,77.815 48.244,77.815
  region net CELL1: 76.36,62.779 76.36,63.154 76.535,63.117 76.535,62.817
  region net CELL2: 74.044,65.832 73.779,65.567 73.929,65.47 74.141,65.682
  region net CH_BATDRV: 65.493,70.601 65.228,70.866 65.343,70.999 65.625,70.716
  region net CH_BATDRV: 68.679,73.354 68.678,72.979 68.503,72.967 68.504,73.367
  region net STRIP_OUT_DRV: 49.96,56.717 49.695,56.982 49.598,56.832 49.81,56.62
  region net STRIP_OUT_DRV: 50.194,56.982 49.929,56.717 50.079,56.62 50.291,56.832
  region net Q2_4: 50.83,58.129 50.829,58.504 50.654,58.466 50.655,58.166
  region net Q2_4: 44.582,63.402 44.207,63.401 44.245,63.226 44.545,63.227
  region net CH_CHARGE_OK: 59.775,63.383 59.42,63.261 59.549,63.12 59.76,63.192
  region net CH_CHARGE_OK: 59.731,63.643 59.356,63.644 59.444,63.819 59.644,63.818
  region net AIN7: 69.01,51.079 69.01,51.454 69.185,51.417 69.185,51.117
  region net P0.00: 70.81,52.729 70.81,53.104 70.944,53.067 70.944,52.767
  region net IMU_INT2: 66.611,53.301 66.373,53.062 66.498,52.964 66.71,53.176
  region net P0.08: 54.238,64.486 53.972,64.222 53.911,64.407 54.053,64.549
  region net P0.08: 54.471,64.253 54.207,63.987 54.392,63.926 54.534,64.067
  region net P1.02: 62.944,44.982 62.679,44.717 62.829,44.62 63.041,44.832
  region net P0.09: 65.194,46.182 64.929,45.917 65.079,45.82 65.291,46.032
  region net I2CM_SDA: 73.33,56.478 73.329,56.853 73.154,56.816 73.154,56.516
  region net I2CM_CLK: 73.329,57.604 73.329,57.229 73.154,57.267 73.154,57.567
  region net U12_16: 73.682,62.201 73.307,62.201 73.344,62.026 73.644,62.026
  region net U12_16: 74.582,55.182 74.207,55.182 74.244,55.357 74.544,55.357
  region net CELL2: 75.032,54.132 74.657,54.132 74.694,54.307 74.994,54.307
  region net CELL1: 78.332,55.332 77.957,55.332 77.994,55.507 78.294,55.507
  region net P1.13: 69.244,49.001 68.979,49.266 69.165,49.328 69.306,49.186
  region net P0.00: 73.682,55.751 73.307,55.752 73.344,55.577 73.644,55.576
  region net P1.07: 67.06,57.617 66.795,57.882 66.733,57.696 66.875,57.555
  region net P1.07: 67.232,58.032 66.857,58.032 66.944,58.207 67.144,58.207
  region net P1.11: 67.59,47.141 67.35,47.379 67.475,47.477 67.687,47.266
  region net VSBUS_DSCH: 63.164,45.715 62.826,45.716 62.896,45.873 63.096,45.872
  region net CH_CHARGE_OK: 63.818,45.854 63.579,46.093 63.739,46.155 63.881,46.014
  region net P1.07: 64.843,47.042 64.605,47.282 64.766,47.344 64.907,47.202
  region net CH_INT_N: 61.835,51.585 61.596,51.347 61.498,51.471 61.71,51.683
  region net P0.11: 63.149,52.895 62.904,52.663 62.809,52.79 63.027,52.996
  region net P0.26: 68.679,53.929 68.679,54.304 68.504,54.266 68.504,53.966
  region net P0.26: 66.16,53.929 66.16,54.304 66.335,54.266 66.335,53.966
  region net SWDCLK: 61.96,45.017 61.695,45.283 61.633,45.097 61.774,44.956
  region net RESET: 53.664,45.07 53.443,44.767 53.635,44.735 53.753,44.897
  region net SWDCLK: 55.66,43.279 55.66,43.654 55.795,43.567 55.795,43.367
  region net IMU_INT2: 71.952,55.01 71.951,55.385 71.776,55.347 71.776,55.047
  region net P0.11: 48.047,69.383 47.672,69.383 47.71,69.208 48.01,69.208
  region net DEC6: 69.16,52.517 68.895,52.782 68.798,52.632 69.01,52.42
  region net DEC6: 66.782,46.332 66.407,46.332 66.445,46.507 66.745,46.507
  region net CH_PROC_HOT: 66.183,56.531 65.808,56.532 65.896,56.707 66.096,56.707
  region net CH_EN_OTG: 64.982,56.532 64.607,56.532 64.694,56.707 64.894,56.707
  region net P0.08: 63.633,56.531 63.258,56.532 63.345,56.665 63.545,56.665
  region net VBUS_GATE_DRV: 62.979,54.529 62.979,54.904 62.804,54.866 62.804,54.566
  region net FAULT: 59.439,47.256 59.266,47.589 59.198,47.455 59.29,47.277
  region net STRIP_OUT_DRV: 58.481,47.777 58.477,48.152 58.303,48.113 58.306,47.813
  region net FAULT: 52.294,46.931 52.028,46.667 52.214,46.605 52.356,46.746
  region net CH_INT_N: 59.201,56.02 59.2,55.645 59.376,55.682 59.376,55.982
  region net I2CM_SDA: 57.318,57.572 56.943,57.572 56.981,57.397 57.281,57.397
  region net I2CM_CLK: 58.334,56.556 57.959,56.556 57.997,56.381 58.297,56.381
  region net I2CM_SDA: 60.429,50.997 60.099,50.928 60.082,51.085 60.382,51.148
  region net I2CM_CLK: 60.957,51.382 60.62,51.382 60.639,51.539 60.939,51.539
  region net RESET: 59.778,50.123 59.513,49.858 59.698,49.796 59.84,49.937
  region net P0.08: 50.565,67.323 50.564,66.948 50.74,67.035 50.74,67.235
  region net VSBUS_DSCH: 51.764,67.725 51.643,67.37 51.834,67.386 51.905,67.597
  region net VBUS_GATE_DRV: 51.284,65.5 51.019,65.235 51.169,65.138 51.381,65.35
  region net P1.09: 51.943,65.876 51.677,65.611 51.862,65.549 52.004,65.69
  region net CH_REGN: 53.71,67.429 53.709,67.804 53.885,67.767 53.885,67.467
  region net CH_REGN: 60.994,74.682 60.729,74.417 60.879,74.32 61.091,74.532
  region net P0.20: 59.356,48.764 59.091,48.499 58.994,48.649 59.206,48.861
  region net U13_13: 47.781,70.074 47.612,70.409 47.47,70.304 47.612,70.022
  region net U13_14: 51.429,62.779 51.429,63.154 51.254,63.117 51.254,62.817
  region net U13_13: 45.31,67.054 45.309,66.679 45.484,66.716 45.485,67.016
  region net U13_14: 45.31,66.304 45.31,65.929 45.485,65.966 45.485,66.266
  region net CC2: 50.712,47.372 50.62,47.008 50.471,47.133 50.522,47.333
  region net CC1: 51.521,47.719 51.255,47.454 51.194,47.639 51.335,47.781
  region net CC2: 49.592,47.046 49.592,47.421 49.767,47.333 49.767,47.133
  region net CC1: 48.876,47.583 48.876,47.958 49.051,47.87 49.051,47.67
  region net P1.09: 63.27,55.849 63.028,55.563 62.951,55.743 63.08,55.895
  region net CH_CHARGE_OK: 57.786,69.84 57.522,69.574 57.707,69.513 57.848,69.655
  region net CH_EN_OTG: 56.745,69.132 56.481,69.398 56.418,69.213 56.559,69.071
  region net CH_PROC_HOT: 60.473,66.272 60.208,66.537 60.146,66.352 60.287,66.21
  region net CH_SRN: 68.979,68.479 68.979,68.854 68.804,68.816 68.804,68.516
  region net CH_SRP: 68.979,69.229 68.979,69.604 68.804,69.566 68.804,69.266
  region net CH_SRP: 65.41,69.679 65.41,70.054 65.585,70.016 65.585,69.717
  region net CH_SRN: 65.451,68.895 65.451,69.27 65.626,69.233 65.626,68.933
  region net CH_LODRV2: 68.731,81.25 68.356,81.252 68.343,81.077 68.743,81.075
  region net CH_HIDRV2: 65.911,73.975 65.597,74.181 65.487,74.044 65.829,73.82
  region net CH_HIDRV2: 63.628,71.637 63.363,71.903 63.478,72.035 63.761,71.752
  region net CH_LODRV2: 62.582,73.332 62.207,73.332 62.194,73.507 62.594,73.507
  region net CH_HIDRV1: 56.132,81.101 55.757,81.101 55.745,80.926 56.145,80.926
  region net CH_HIDRV1: 59.26,73.416 58.995,73.151 58.862,73.266 59.145,73.549
  region net CH_LODRV1: 60.855,72.928 60.589,73.193 60.457,73.077 60.74,72.795
  region net CH_LODRV1: 53.867,74.428 53.603,74.162 53.718,74.029 54,74.313
  region net P0.20: 55.943,50.864 55.942,51.239 56.117,51.201 56.118,50.901
  region net R15_2: 57.089,53.403 56.714,53.404 56.752,53.579 57.052,53.578
  region net R15_2: 53.044,59.233 52.78,58.967 52.93,58.87 53.142,59.083
  region net D-: 59.381,52.505 59.378,52.13 59.246,52.219 59.248,52.419
  region net D+: 59.379,51.379 59.379,51.754 59.204,51.667 59.204,51.467
  region net I2CM_SDA: 69.632,57.432 69.257,57.432 69.294,57.607 69.594,57.607
  region net I2CM_SDA: 69.632,57.102 69.257,57.101 69.295,56.926 69.595,56.926
  region net I2CM_CLK: 70.382,57.432 70.007,57.432 70.045,57.607 70.345,57.607
  region net I2CM_CLK: 70.382,57.101 70.007,57.101 70.044,56.967 70.344,56.967
  region net D+: 47.923,50.511 47.923,50.886 48.098,50.798 48.098,50.598
  region net D-: 48.515,51.19 48.25,51.456 48.436,51.517 48.577,51.376
  region net I2CM_SDA: 60.899,64.962 60.524,64.962 60.612,65.137 60.812,65.137
  region net I2CM_SDA: 60.961,64.812 60.696,64.547 60.846,64.449 61.059,64.661
  region net I2CM_CLK: 61.596,65.033 61.331,65.299 61.517,65.36 61.658,65.219
  region net I2CM_CLK: 61.521,64.87 61.502,65.245 61.679,65.216 61.694,64.916
  region net P1.11: 73.315,47.481 72.44,48.881 72.211,47.946 72.374,47.685
  region net AIN7: 79.967,55.392 79.967,53.742 79.197,54.417 79.197,54.717
  region net P0.09: 75.899,46.361 75.403,47.935 74.869,47.066 74.963,46.766
  region net P1.02: 73.548,44.312 73.216,45.929 72.597,45.116 72.658,44.816
  region net P1.13: 77.698,48.611 77.203,50.185 76.685,49.267 76.748,49.067
  region net I2CM_CLK: 69.383,64.167 69.383,65.667 68.683,65.017 68.683,64.817
  region net I2CM_SDA: 68.018,67.493 67.522,66.077 67.074,66.917 67.145,67.117
  region net STRIP_OUT_DRV: 50.807,55.963 49.682,55.963 50.095,56.488 50.395,56.488
  region net P1.07: 67.428,59.807 66.352,59.477 66.944,59.11 67.144,59.171

## Silkscreen, mask and mechanical layers (free items; w line width, h text height)
Top Overlay:
  circle w0.254: c41.245,56.217 r1.397
  circle w0.254: c42.295,53.517 r1.397
  circle w0.254: c68.995,42.267 r1.397
  lines w0.254: 53.726,40.792 55.282,40.792 55.282,43.586 53.726,43.586 53.726,40.792
  lines w0.254 net S$72260: 44.557,50.245 45.446,50.118 47.986,47.07
  lines w0.254 net S$72264: 46.589,44.657 47.986,46.181 47.986,47.07
  lines w0.254 net S$72268: 47.987,46.18 48.876,46.307 52.12,44.28 52.516,43.388 51.289,41.481
  lines w0.254 net S$72290: 42.779,49.102 44.557,50.245
  lines w0.3 net S$488287: 79.644,59.066 83.094,58.767
  lines w0.3 net S$488291: 79.195,56.516 82.495,55.616
  lines w0.8 net S$72297: 60.029,62.927 60.78,61.842 61.588,60.682 62.061,60.006
  lines w0.8 net S$72301: 60.028,60.004 61.222,61.223
  text "7" at 79.22,54.626 h0.8 r154
  text "5" at 75.295,53.317 h0.8 r180
  text "6" at 77.81,51.515 h0.8 r185
  text "3" at 73.494,51.066 h0.8 r180
  text "4" at 76.58,49.34 h0.8 r144
  text "1" at 71.844,49.116 h0.8 r180
  text "2" at 74.394,47.017 h0.8 r180
  text "0" at 72.144,44.917 h0.8 r180
Bottom Overlay:
  circle w0.254: c42.295,53.517 r1.397
  circle w0.254: c41.245,56.217 r1.397
  circle w0.254: c68.995,42.267 r1.397
  lines w0.2 net S$72368: 57.741,39.631 57.893,39.631 62.846,44.584 ; 57.741,42.122 57.898,42.122 60.36,44.584
  lines w0.2 net S$72378: 59.995,39.267 65.361,44.584 65.622,44.584
  lines w0.2 net S$72382: 62.695,39.267 67.69,44.244
  lines w0.2 net S$72386: 65.395,39.567 67.471,41.613
  lines w0.254 net S$334299: 42.78,49.102 44.558,50.245 45.447,50.118 47.987,47.07 47.987,46.181 46.59,44.657
  lines w0.254 net S$334303: 47.987,46.18 48.876,46.307 52.287,44.209 52.559,43.387 51.289,41.481
  lines w0.3 net S$488258: 79.644,59.067 83.094,58.767
  lines w0.3 net S$488268: 79.195,56.516 82.495,55.616
  lines w0.8 net S$72368: 57.741,39.632 57.741,44.585 67.495,44.667 67.495,40.167
  text "LAMP-DA" at 67.945,78.267 h3
  text "B-" at 75.508,68.859 h1 r190
  text "B+" at 75.958,66.459 h1 r190
  text "I2C" at 70.291,65.763 h1 r315
  text "λ" at 65.844,65.517 h15
  text "B1" at 76.408,63.909 h1 r190
  text "V1.1" at 63.595,62.817 h1.5
  text "B0" at 76.858,61.359 h1 r190
  text "SYS+" at 46.186,61.117 h1 r359
  text "V33E_E" at 69.595,60.816 h1
  text "V33" at 79.734,56.472 h0.7 r350
  text "OUT_E" at 52.945,55.866 h1
  text "GND" at 46.592,55.096 h1 r15
  text "7" at 79.418,53.874 h0.8 r349
  text "VBUS" at 48.412,52.696 h1 r20
  text "5" at 75.744,52.517 h0.8
  text "6" at 78.26,50.718 h0.8 r355
  text "3" at 73.945,50.266 h0.8
  text "D-" at 48.4,49.581 h1 r35
  text "4" at 77.03,48.693 h0.8 r36
  text "1" at 72.144,48.316 h0.8
  text "D+" at 50.118,48.113 h1 r45
  text "CC1" at 52.079,47.291 h1 r55
  text "CC2" at 54.135,46.566 h1 r60
  text "2" at 74.995,46.217 h0.8
  text "0" at 72.595,44.117 h0.8
  text "ANT" at 64.472,40.301 h1.2